# Altium PCB uarttors485_2codeic.PcbDoc
Units mil, origin at the board's own origin, x right, y up, seen from the top; angles counter-clockwise.
Board outline 2145.67 x 1673.23 mil, 2 copper layers (Top Layer, Bottom Layer); 19 components, 11 nets, 50 pads, 6 vias.
Unrouted connection lines stored in the file: 2.
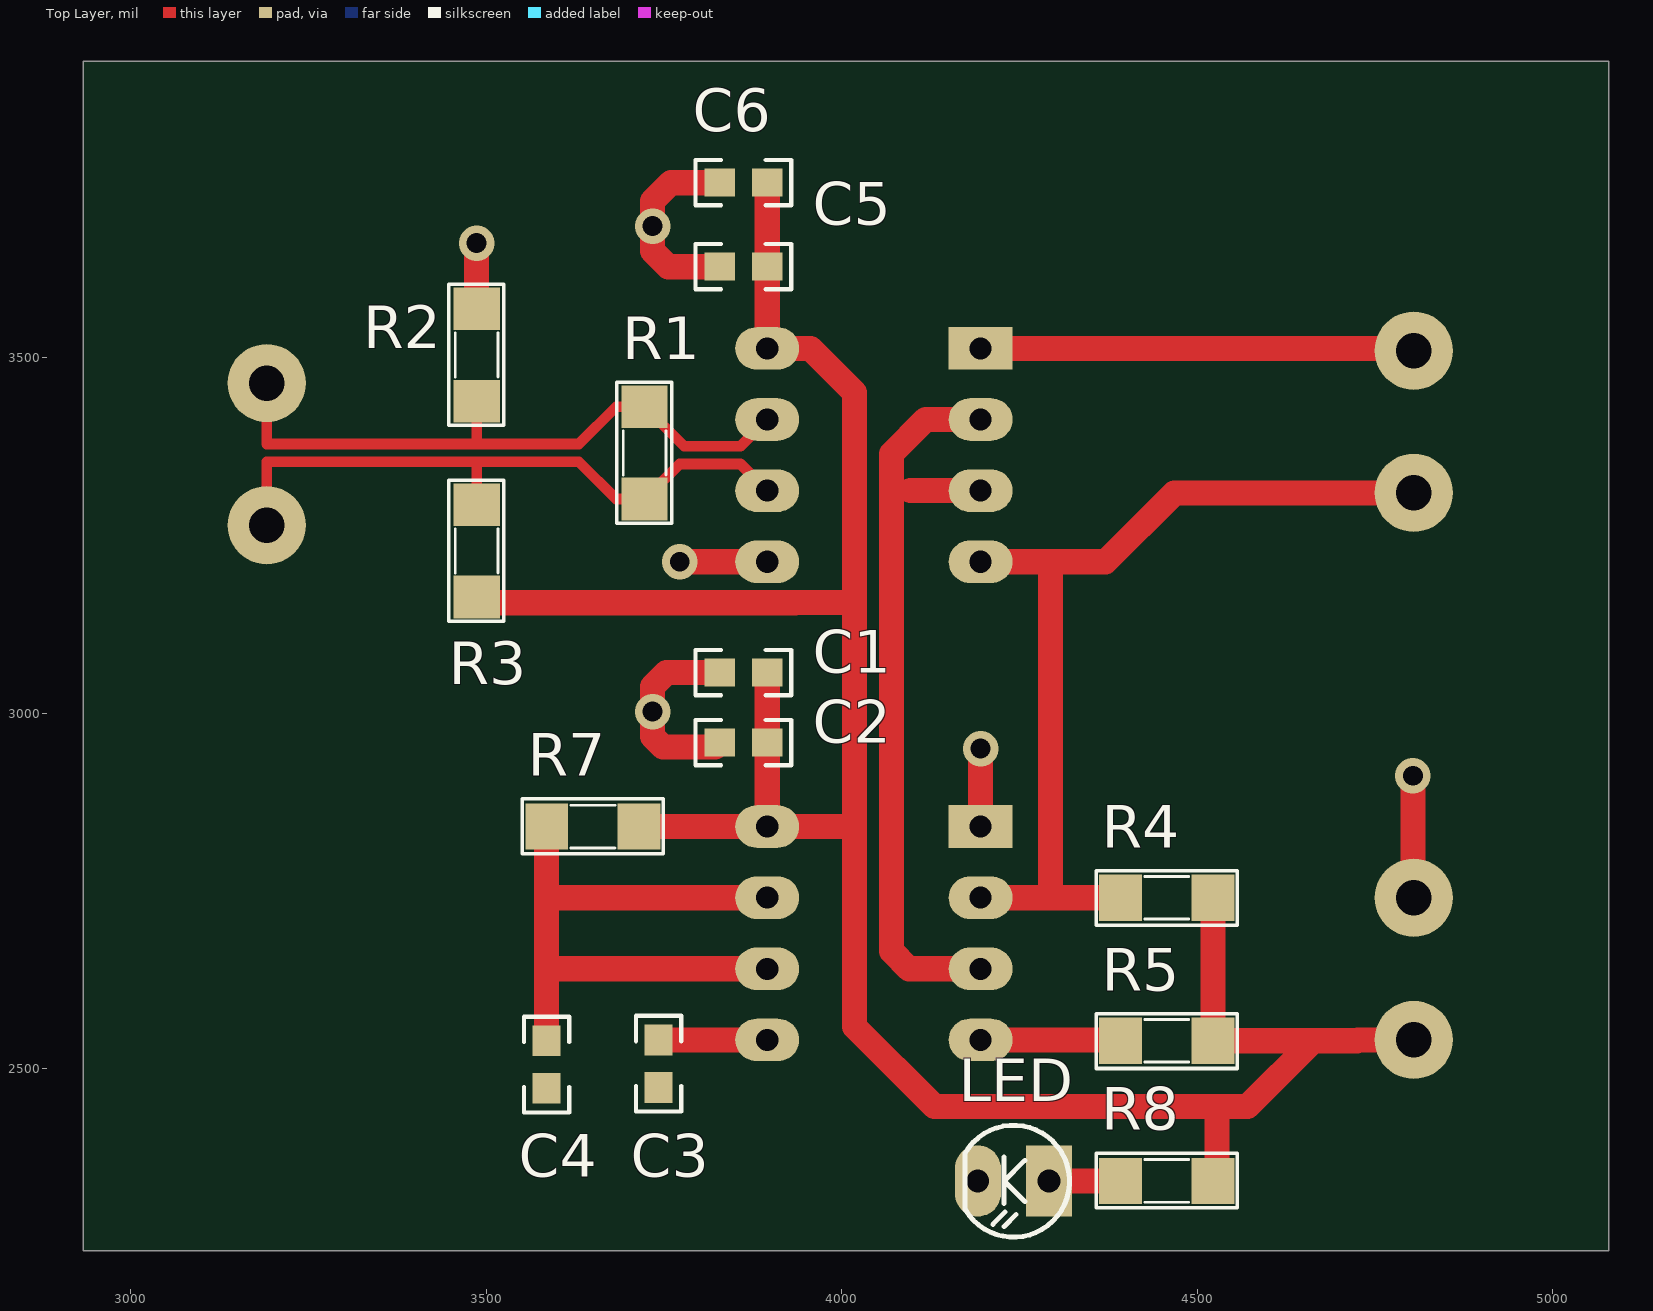
[diagram p0: Top Layer view]
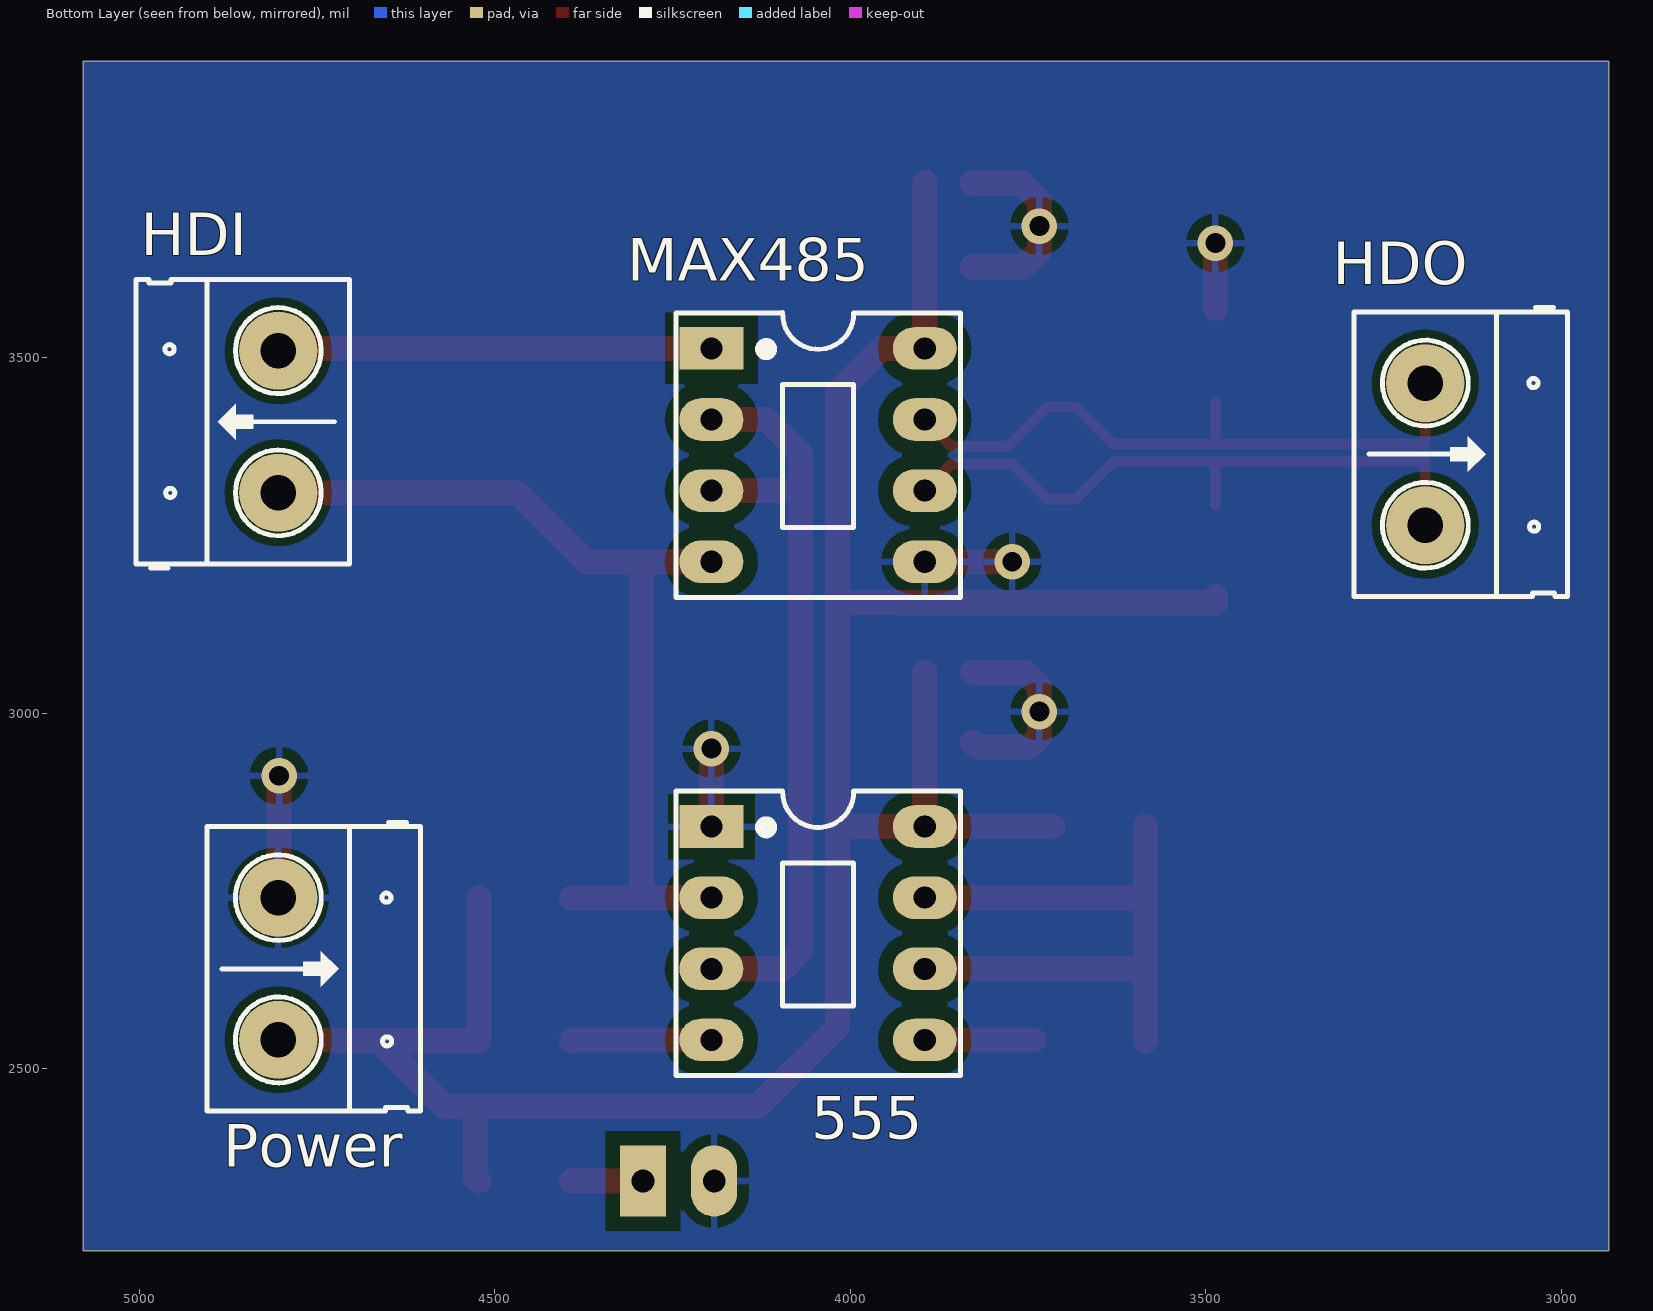
[diagram p1: Bottom Layer view, seen from below]
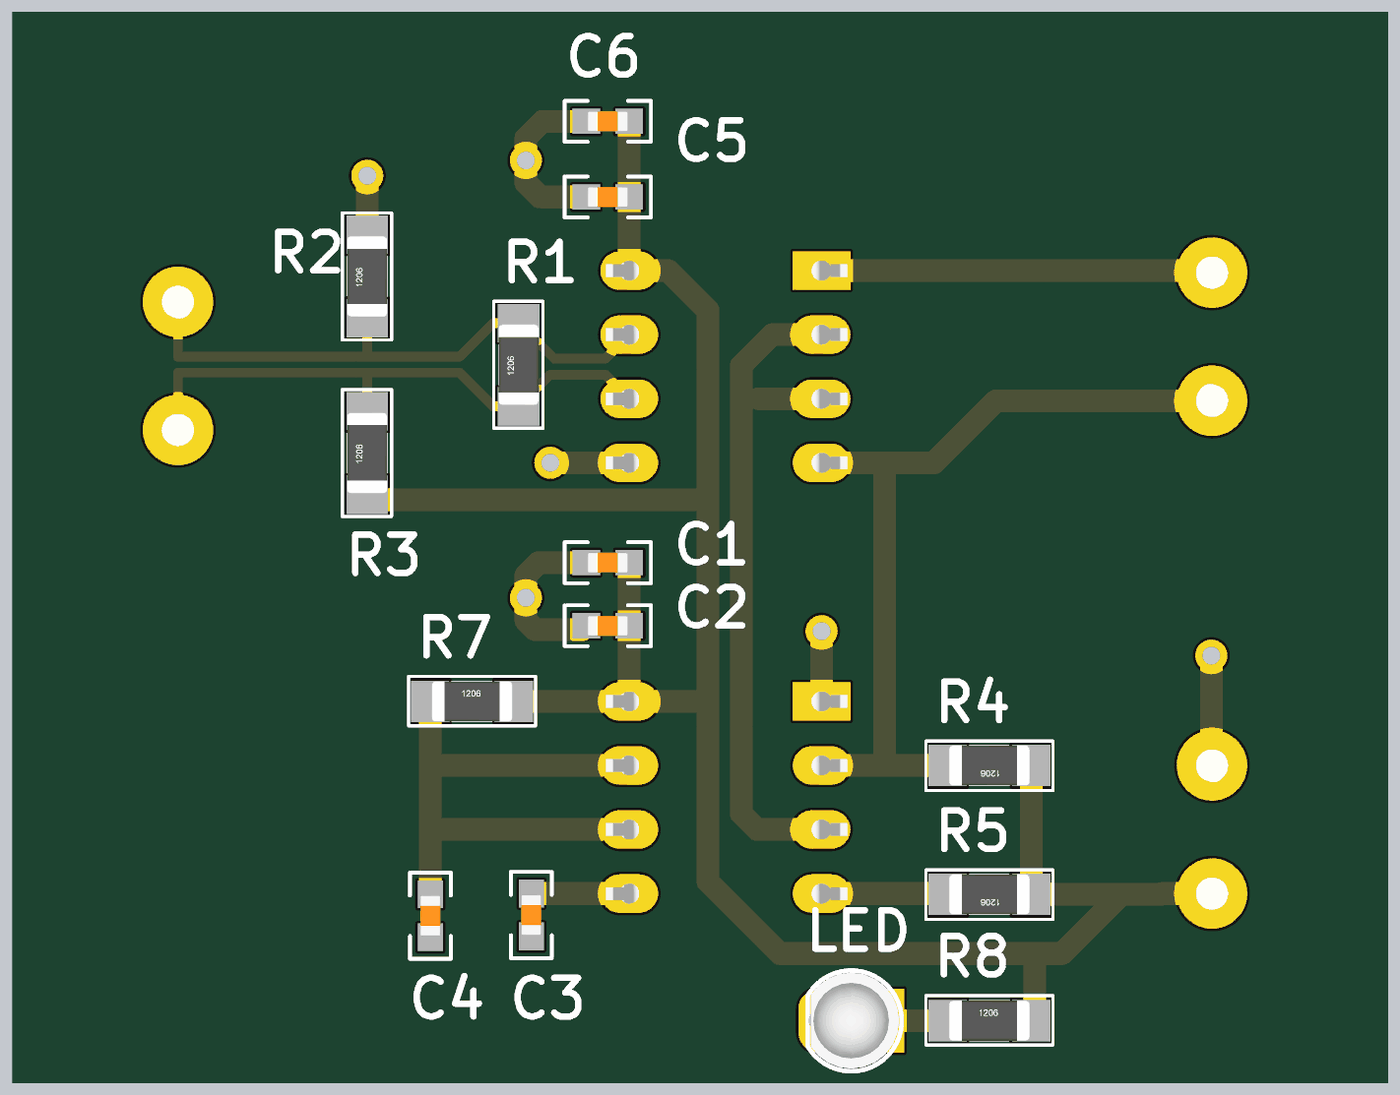
[diagram p2: 3D render of the assembled board from above, using the file's embedded part models]
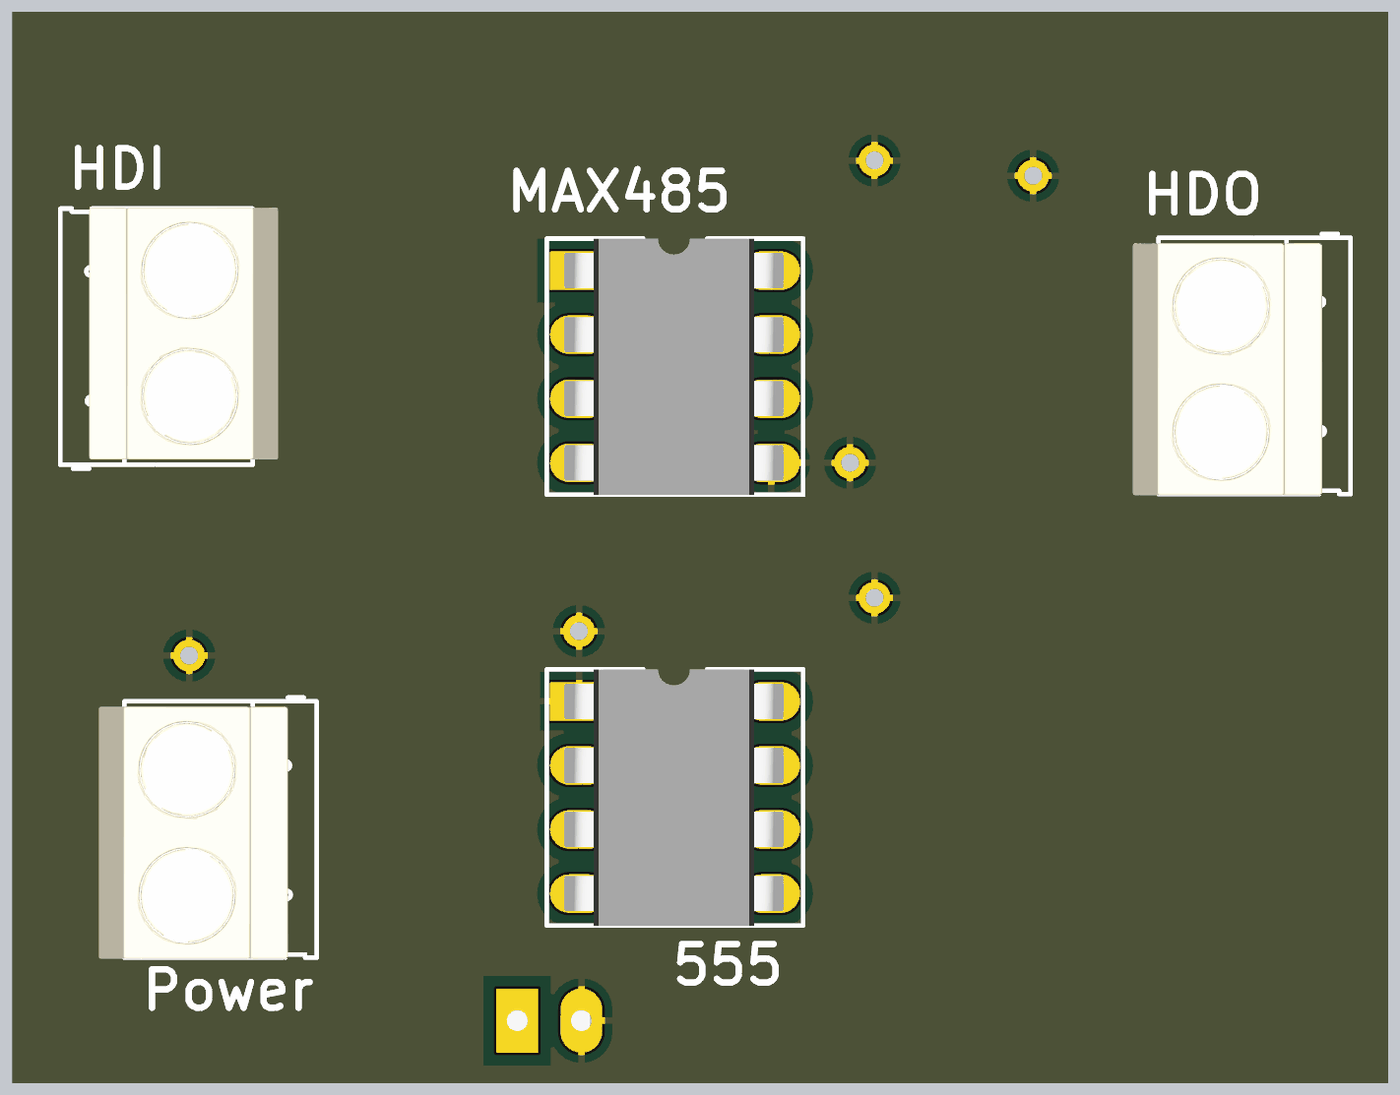
[diagram p3: 3D render of the assembled board from below, using the file's embedded part models]

## Layer stack, top to bottom
Top Solder: solder mask 0.4, Solder Resist, Dk 3.5
Top Layer: signal copper 1.4
Dielectric 1: dielectric 12.6, FR-4, Dk 4.8
Bottom Layer: signal copper 1.4
Bottom Solder: solder mask 0.4, Solder Resist, Dk 3.5

## Board outline
2933.07,3917.32 5078.74,3917.32 5078.74,2244.09 2933.07,2244.09

## Design rules (kind name [scope] priority, off if disabled: settings)
Clearance Clearance_5 [InNamedPolygon('Bottom Layer-No Net')] p1: gap=10 ignorepadtopadclearanceinfootprint=FALSE except(0: Arc-Hole Track-Hole SMDPad-Hole THPad-Hole Via-Hole Fill-Hole Poly-Hole Region-Hole Text-Hole; 20: Arc-Fill Arc-Poly Arc-Region Track-Fill Track-Poly Track-Region THPad-Fill THPad-Poly THPad-Region)
Clearance Clearance_4 [InNamedPolygon('Bottom Layer-No Net')] p2: gap=10 ignorepadtopadclearanceinfootprint=FALSE except(0: Arc-Hole Track-Hole SMDPad-Hole THPad-Hole Via-Hole Fill-Hole Poly-Hole Region-Hole Text-Hole; 20: Arc-Fill Arc-Poly Arc-Region Track-Fill Track-Poly Track-Region THPad-Fill THPad-Poly THPad-Region)
Clearance Clearance_3 [InNamedPolygon('Top Layer-No Net')] p3: gap=10 ignorepadtopadclearanceinfootprint=FALSE except(0: Arc-Hole Track-Hole SMDPad-Hole THPad-Hole Via-Hole Fill-Hole Poly-Hole Region-Hole Text-Hole; 20: Arc-Fill Arc-Poly Arc-Region Track-Fill Track-Poly Track-Region THPad-Fill THPad-Poly THPad-Region)
Clearance Clearance_2 [InNamedPolygon('Top Layer-No Net')] p4: gap=10 ignorepadtopadclearanceinfootprint=FALSE except(0: Arc-Hole Track-Hole SMDPad-Hole THPad-Hole Via-Hole Fill-Hole Poly-Hole Region-Hole Text-Hole; 20: Arc-Fill Arc-Poly Arc-Region Track-Fill Track-Poly Track-Region THPad-Fill THPad-Poly THPad-Region)
Clearance Clearance_1 [InNamedPolygon('Top Layer-No Net')] p5: gap=10 ignorepadtopadclearanceinfootprint=FALSE except(0: Arc-Hole Track-Hole SMDPad-Hole THPad-Hole Via-Hole Fill-Hole Poly-Hole Region-Hole Text-Hole; 20: Arc-Fill Arc-Poly Arc-Region Track-Fill Track-Poly Track-Region THPad-Fill THPad-Poly THPad-Region)
Clearance [All] p6: gap=10 ignorepadtopadclearanceinfootprint=FALSE except(0: Arc-Hole Track-Hole SMDPad-Hole THPad-Hole Via-Hole Fill-Hole Poly-Hole Region-Hole Text-Hole; 20: Arc-Fill Arc-Poly Arc-Region Track-Fill Track-Poly Track-Region THPad-Fill THPad-Poly THPad-Region)
DiffPairsRouting [All] p1: maxlimit=10 minlimit=10 mostfreqgap=10 toplayer_minwidth=15 toplayer_maxwidth=15 toplayer_prefwidth=15 bottomlayer_minwidth=15 bottomlayer_maxwidth=15 bottomlayer_prefwidth=15 maxuncoupledlength=500
PolygonConnect PolygonConnect_4 [All vs IsNamedPolygon('Bottom Layer-No Net')] p1: connectstyle=Relief reliefconductorwidth=10 reliefentries=4 polygonreliefangle="90 Angle" airgapwidth=15.75
PolygonConnect PolygonConnect_3 [All vs IsNamedPolygon('Bottom Layer-No Net')] p2: connectstyle=Relief reliefconductorwidth=10 reliefentries=4 polygonreliefangle="90 Angle" airgapwidth=11.81
PolygonConnect PolygonConnect_2 [All vs IsNamedPolygon('Top Layer-No Net')] p3: connectstyle=Relief reliefconductorwidth=10 reliefentries=4 polygonreliefangle="90 Angle" airgapwidth=11.81
PolygonConnect PolygonConnect_1 [All vs IsNamedPolygon('Top Layer-No Net')] p4: connectstyle=Relief reliefconductorwidth=10 reliefentries=4 polygonreliefangle="90 Angle" airgapwidth=10
PolygonConnect [All] p5: connectstyle=Relief reliefconductorwidth=10 reliefentries=4 polygonreliefangle="90 Angle" airgapwidth=10
RoutingVias [All] p1: holewidth=28 width=50 viastyle="Through Hole" minholewidth=28 minwidth=50 maxholewidth=28 maxwidth=50
SolderMaskExpansion [All] p1: expansion=4
Width [All] p1: maxlimit=43.31 minlimit=35.43 preferedwidth=39.37
29 further rules are at their usual default settings.

## Classes and differential pairs
differential pair class RS485DIFF: ""
component class uartto485: 555 C3 C4 HDI HDO MAX485 R1 R2 R3 R4 R5 R7
component class power: C1 C2 C5 C6 LED Power R8
differential pair "": +_P -_N

## Components (designator, comment, footprint, x,y, rotation, side; value= is the part's Value field where it differs from the comment)
555 "LM555" DIP8/W0.3 4195.16,2840.87 r270 bottom
C1 "22uF" "CAPC-0603 (1608)" 3861.69,3057.4 r0 top value=33p/50V
C2 "22uF" "CAPC-0603 (1608)" 3861.69,2958.98 r0 top value=33p/50V
C3 "10uF" "CAPC-0603 (1608)" 3742.4,2507.4 r90 top value=33p/50V
C4 "0.01uF" "CAPC-0603 (1608)" 3584.92,2506.22 r90 top value=33p/50V
C5 "22uF" "CAPC-0603 (1608)" 3861.69,3628.27 r0 top value=33p/50V
C6 "22uF" "CAPC-0603 (1608)" 3861.69,3746.38 r0 top value=33p/50V
HDI "Header 2_1" HED2 4804.21,3310.16 r90 bottom value="Header 2"
HDO "Header 2_1" HED2 3191.22,3464.57 r270 bottom value="Header 2"
LED "LED" LED-3 4291.34,2342.52 r180 top value="LED 3 ly Single Colour"
MAX485 "MAX485" DIP8/W0.3 4195.16,3513.31 r270 bottom
Power "Header 2_1" HED2 4804.21,2740.87 r270 bottom value="Header 2"
R1 "120" SM-RES-1206 3722.72,3301.42 r90 top value="R1/4W - 1K"
R2 "20k" SM-RES-1206 3486.5,3439.21 r90 top value="R1/4W - 1K"
R3 "20k" SM-RES-1206 3486.5,3163.62 r90 top value="R1/4W - 1K"
R4 "10k" SM-RES-1206 4522.01,2740.87 r180 top value="R1/4W - 1K"
R5 "1k" SM-RES-1206 4522.01,2539.69 r180 top value="R1/4W - 1K"
R7 "6.8k" SM-RES-1206 3584.92,2840.87 r0 top value="R1/4W - 1K"
R8 "1k" SM-RES-1206 4392.01,2342.52 r0 top value="R1/4W - 1K"

## Footprints (in the part's own frame and the unit in brackets; to place one, negate y for a bottom-side part, rotate by r counter-clockwise, add the part's x,y. Pads: shape width x height; smd on the part's side, far side on the other; paste and mask are expansions set on the pad)
"CAPC-0603 (1608)" [mm] "Resistor, Chip; 1.60 mm L X 0.80 mm W X 0.50 mm H body"
  rect 1.1x1 smd mask+0.1: 1(-0.85,0) 2(0.85,0)
  silkscreen extent -1.71,-0.81 1.71,0.81, body extent -0.8,-0.4 0.8,0.4, height 0.6
DIP8/W0.3 [mil] "8 PIN, W 300mil, Pin to pin 100mil"
  rect 60x90 hole 31: 1(0,0)
  oval 60x90 hole 31: 2(100,0) 3(200,0) 4(300,0) 5(300,300) 6(200,300) 7(100,300) 8(0,300)
  silkscreen extent -50,-50 350,350, body extent -50,-40 350,336, height 201
HED2 [mil] "Header 2, 2 pin, hight 300mil, Pin to Pin 200, Colour Green"
  round 110 hole 50: 1(0,0) 2(200,0)
  silkscreen extent -106,-100 300,200, body extent -92,-140 302,155, height 394
LED-3 [mil] "LED 2 PIN, 3ly Only colour"
  rect 65x100 hole 32: 1(0,0)
  oval 65x100 hole 32: 2(100,0)
  silkscreen extent -29,-78 118,79, body extent -25,-75 113,75, height 217
SM-RES-1206 [mil]
  rect 60x65 smd: 1(0,0) 2(130,0)
  silkscreen extent -34,-38 164,39, body extent 2,-31 128,32, height 40

## Part data
555: "Timer"
C1 C2 C3 C4 C5 C6: library part 0603N330J500CT, "CAP CER 33pF 50V 5%  0603", MPN="CL10C330JB8NNNC, 0603N330J500CT", Category=CAPACITOR, CompanyID=VT-01106, PinCount=2, Solder=SMT
HDI HDO Power: "Header, 2-Pin", Manufacturer="Generic Components", Class=Connector
LED: "LED Single colour Green and Red"
MAX485: "RS232 - RS485 (Same sn75176)"
R1 R2 R3 R4 R5 R7 R8: library part R, "Resistor 1/4W"

## Via types
v1: diameter 50, hole 28, Top Layer to Bottom Layer, 6 vias

## Nets (pads, with @x,y where several pads share a name; then routed paths per layer and width w, separated by ;. In a path a pad name is that pad's centre, name@x,y a point inside that pad or via, vN(x,y) a via of type N, cw(c..) or ccw(c..) an arc to the next point about the centre after c; other vN are vias at no path point)
_N: HDO.1 MAX485.7 R1.2 R2.1 | length 916.4
  Top Layer w15: HDO.1@3191.22,3470.79 3191.22,3378.92 3486.5,3378.92 ; R2.1 3486.5,3378.92 ; MAX485.7 3857.66,3375.81 3778.33,3375.81 R1.2 3682.72,3431.42 3630.22,3378.92 3486.5,3378.92
_P: HDO.2 MAX485.6 R1.1 R3.2 | length 905.1
  Top Layer w15: HDO.2@3191.22,3270.79 3191.22,3353.92 3486.5,3353.92 ; R3.2 3486.5,3353.92 ; MAX485.6 3857.66,3350.81 3772.11,3350.81 R1.1 3682.72,3301.42 3630.22,3353.92 3486.5,3353.92
GND: 555.1 C1.1 C2.1 C3.1 C4.1 C5.1 C6.1 LED.2 MAX485.5 Power.1 R2.2 | length 1051.8
  Top Layer w35.43: R2.2 v1(3486.5,3661.42) ; v1(3772.11,3213.31) MAX485.5 ; C2.1 3822.01,2952.76 3748.62,2952.76 3733.94,2967.44 3733.94,3037.72 3753.62,3057.4 C1.1 ; C5.1 3755.87,3628.27 3733.94,3650.2 v1(3733.94,3685.33) 3733.94,3720.47 3759.84,3746.38 C6.1 ; 555.1 v1(4195.16,2950.51) ; v1(4803.15,2912.32) 4803.15,2740.87 Power.1
  other v1: 3733.94,3002.58
Net555_2: 555.2 HDI.1 MAX485.4 R4.2 | length 1318.5
  Top Layer w35.43: 555.2 4293.58,2740.87 ; MAX485.4 4293.58,3213.31 ; R4.2 4293.58,2740.87 ; HDI.1 4467.6,3310.16 4370.75,3213.31 4293.58,3213.31 ; 4293.58,2740.87 4293.58,3213.31
Net555_3: 555.3 MAX485.2 MAX485.3 | length 1078.8
  Top Layer w35.43: 4096.73,3313.31 MAX485.3 ; 555.3 4094.63,2640.87 4069.83,2665.66 4069.83,3365.15 4117.99,3413.31 MAX485.2
Net555_4: 555.4 R5.2 | length 197.3
  Top Layer w35.43: 555.4 4390.83,2540.87 R5.2
Net555_5: 555.5 C3.2 | length 152.8
  Top Layer w35.43: C3.2 555.5
Net555_6: 555.6 555.7 C4.2 R7.1 | length 923.6
  Top Layer w35.43: C4.2 3584.92,2644.02 ; R7.1 3584.92,2742.44 ; 555.6 3588.07,2640.87 3584.92,2644.02 ; 555.7 3586.5,2740.87 3584.92,2742.44 ; 3584.92,2644.02 3584.92,2742.44
NetHDI_2: HDI.2 MAX485.1 | length 610.4
  Top Layer w35.43: MAX485.1 4801.06,3513.31 HDI.2
NetLED_1: LED.1 R8.1 | length 100.7
  Top Layer w35.43: LED.1 R8.1
VCC: 555.8 C1.2 C2.2 C5.2 C6.2 MAX485.8 Power.2 R3.1 R4.1 R5.1 R7.2 R8.2 | length 3653.4
  Top Layer w35.43: R3.1 3486.5,3155.59 3934.06,3155.59 3934.3,3155.83 4017.99,3155.83 ; R7.2 555.8 ; C1.2 C2.2 555.8 ; C6.2 C5.2 MAX485.8 3955.79,3513.31 4017.99,3451.1 4017.99,3155.83 ; R8.2 4527.56,2348.07 4527.56,2447.17 ; R4.1 R5.1 4663.11,2539.69 ; Power.2 4725.59,2540.87 4724.41,2539.69 4663.11,2539.69 ; 555.8 4017.99,2840.87 ; 4017.99,2840.87 4017.99,2559.37 4130.2,2447.17 4527.56,2447.17 ; 4017.99,2840.87 4017.99,3155.83 ; 4527.56,2447.17 4570.59,2447.17 4663.11,2539.69

## Polygon pours and split planes (outlines as drawn)
GND on Bottom Layer "Bottom Layer-No Net" (solid, pour order 10): 2933.07,3917.32 5078.74,3917.32 5078.74,2244.09 2933.07,2244.09